# Altium PCB Motor_Control_Board.PcbDoc
Units mil, origin at the board's own origin, x right, y up, seen from the top; angles counter-clockwise.
Board outline 4564.96 x 4140.75 mil, 2 copper layers (Top Layer, Bottom Layer), stack 65.792 mil thick; 131 components, 117 nets, 711 pads, 12 vias.
Unrouted connection lines stored in the file: 368.
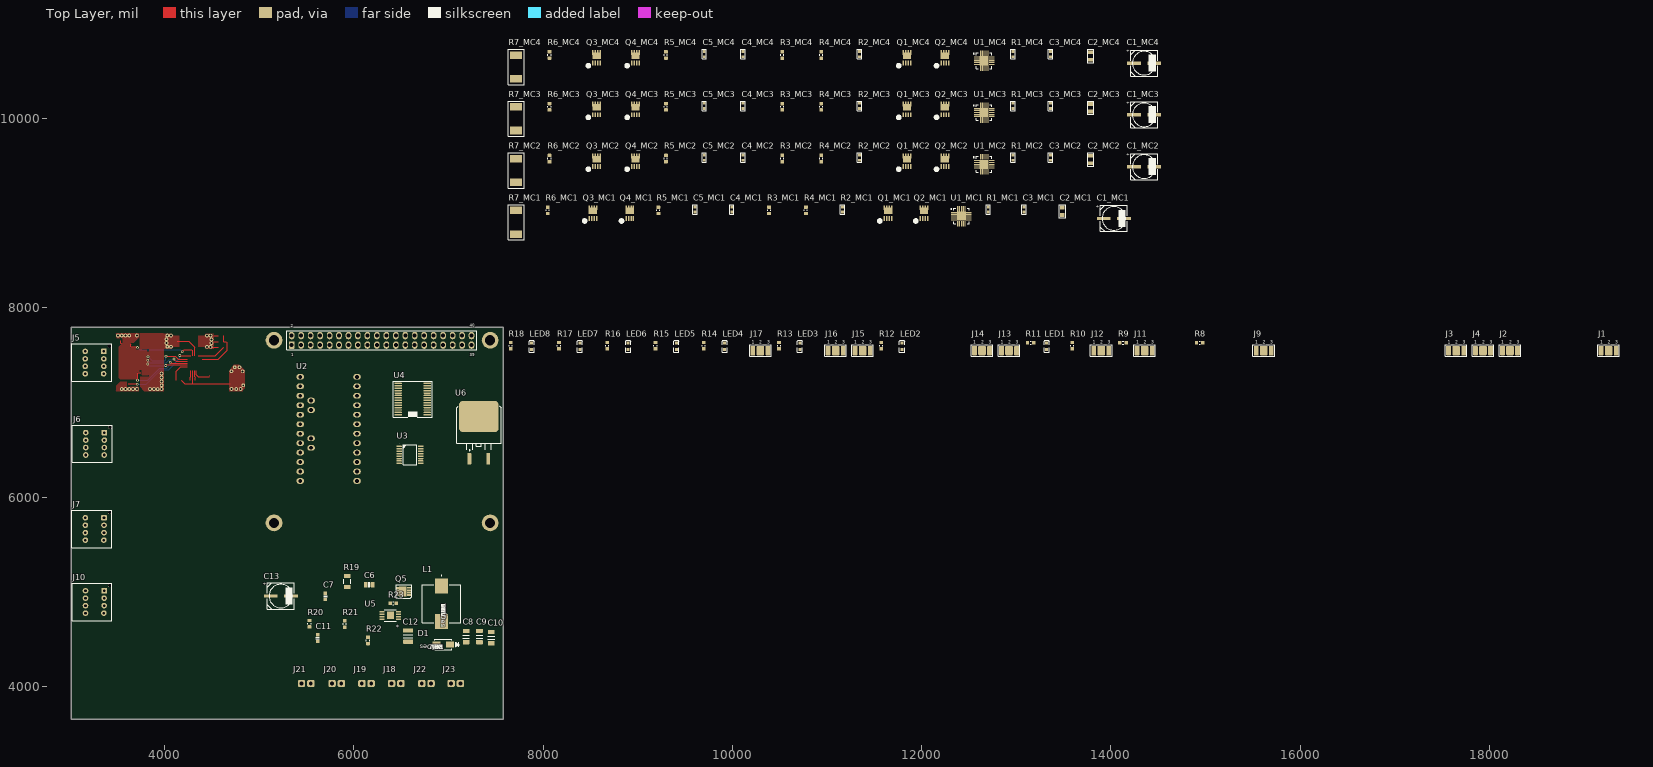
[diagram p0: Top Layer view]
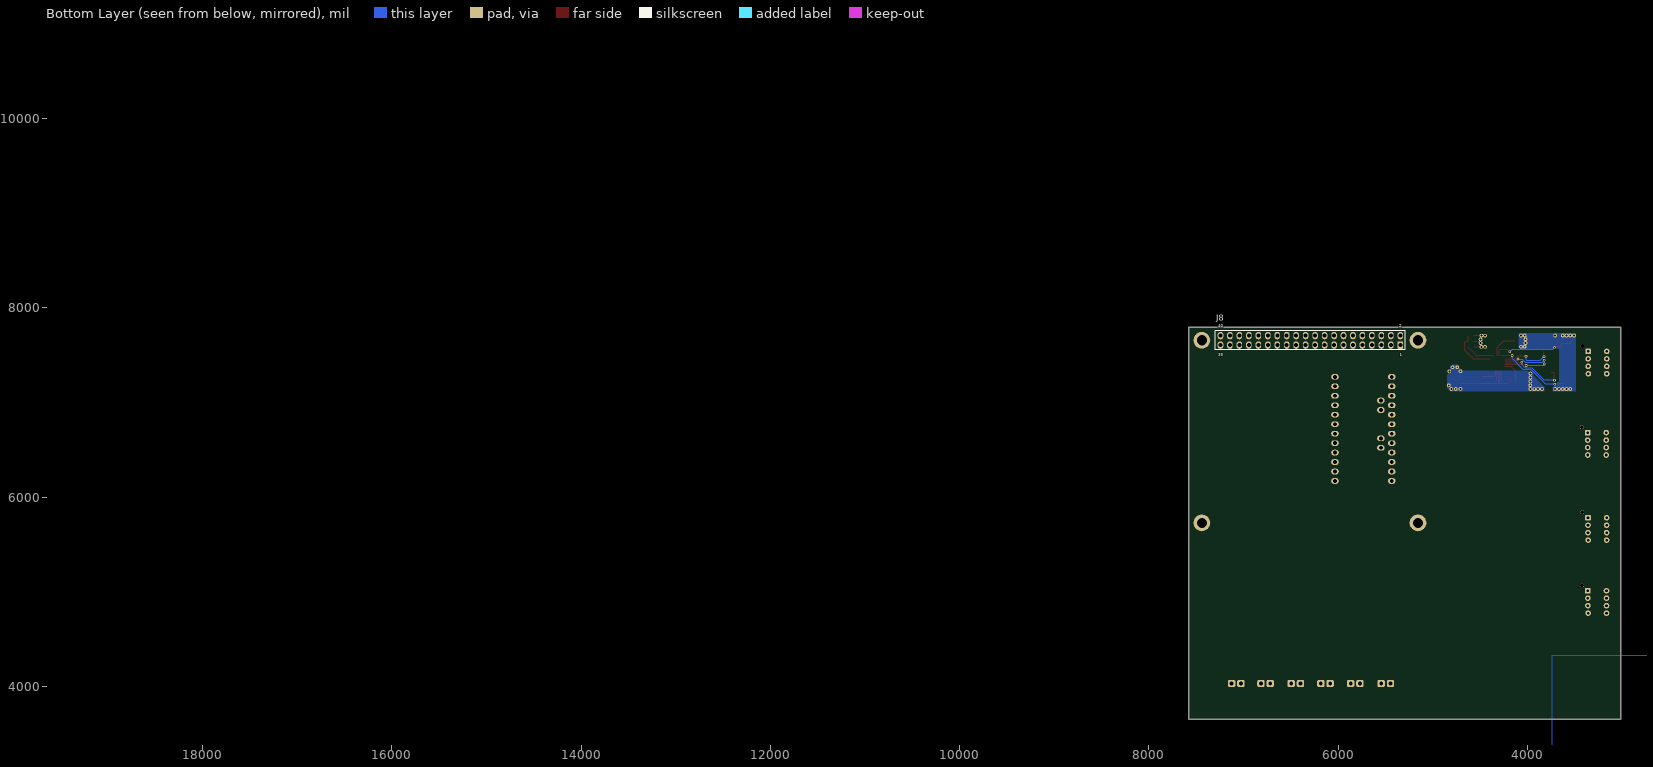
[diagram p1: Bottom Layer view, seen from below]

## Layer stack, top to bottom
Top Solder: solder mask 0.4, Solder Resist, Dk 3.5
Top Layer: signal copper 1.4
Dielectric 1: dielectric 62.9921, FR-4, Dk 4.8
Bottom Layer: signal copper 1.4
Bottom Solder: solder mask 0.4, Solder Resist, Dk 3.5

## Board outline
3013.78,3654.53 3013.78,7795.28 7578.74,7795.28 7578.74,3654.53

## Design rules (kind name [scope] priority, off if disabled: settings)
Clearance [All] p1: gap=6
PlaneConnect [All] p1: planeconnectstyle=Direct reliefexpansion=20 reliefentries=4 reliefconductorwidth=10 reliefairgap=10
PolygonConnect [All] p1: connectstyle=Direct reliefconductorwidth=10 reliefentries=4 polygonreliefangle="90 Angle" airgapwidth=10
RoutingVias [All] p1: holewidth=28 width=50 viastyle="Through Hole" minholewidth=13 minwidth=20 maxholewidth=50 maxwidth=100
SolderMaskExpansion [All] p1: expansion=4
UnpouredPolygon [All] p1: allowunpoured=FALSE
Width [All] p1: maxlimit=1000 minlimit=6 preferedwidth=10 minimp=50.000000 maximp=50.000000 favimp=50.000000
28 further rules are at their usual default settings.

## Classes and differential pairs
component class Main: J1 J2 J3 J4 J5 J6 J7 J8 J9 J10 J11 J12 J13 J14 J15 J16 J17 LED1 LED2 LED3 LED4 LED5 LED6 LED7 LED8 R8 R9 R10 R11 R12 R13 R14 R15 R16 R17 R18 U2 U3 U4
component class MC1: C1_MC1 C2_MC1 C3_MC1 C4_MC1 C5_MC1 Q1_MC1 Q2_MC1 Q3_MC1 Q4_MC1 R1_MC1 R2_MC1 R3_MC1 R4_MC1 R5_MC1 R6_MC1 R7_MC1 U1_MC1
component class MC2: C1_MC2 C2_MC2 C3_MC2 C4_MC2 C5_MC2 Q1_MC2 Q2_MC2 Q3_MC2 Q4_MC2 R1_MC2 R2_MC2 R3_MC2 R4_MC2 R5_MC2 R6_MC2 R7_MC2 U1_MC2
component class MC3: C1_MC3 C2_MC3 C3_MC3 C4_MC3 C5_MC3 Q1_MC3 Q2_MC3 Q3_MC3 Q4_MC3 R1_MC3 R2_MC3 R3_MC3 R4_MC3 R5_MC3 R6_MC3 R7_MC3 U1_MC3
component class MC4: C1_MC4 C2_MC4 C3_MC4 C4_MC4 C5_MC4 Q1_MC4 Q2_MC4 Q3_MC4 Q4_MC4 R1_MC4 R2_MC4 R3_MC4 R4_MC4 R5_MC4 R6_MC4 R7_MC4 U1_MC4
component class Power_Supply: C6 C7 C8 C9 C10 C11 C12 C13 D1 J18 J19 J20 J21 J22 J23 L1 Q5 R19 R20 R21 R22 R23 U5 U6
net class A_ENC[0..3]: A_ENC0 A_ENC1 A_ENC2 A_ENC3
net class A_OUT[0..3]: A_OUT0 A_OUT1 A_OUT2 A_OUT3
net class AIOUT[0..3]: AIOUT0 AIOUT1 AIOUT2 AIOUT3
net class B_ENC[0..3]: B_ENC0 B_ENC1 B_ENC2 B_ENC3
net class B_OUT[0..3]: B_OUT0 B_OUT1 B_OUT2 B_OUT3
net class ENABLE[0..3]: ENABLE0 ENABLE1 ENABLE2 ENABLE3
net class MODE[0..3]: MODE0 MODE1 MODE2 MODE3
net class PHASE[0..3]: PHASE0 PHASE1 PHASE2 PHASE3
channel class Motor_Control: MC1 MC2 MC3 MC4

## Components (designator, comment, footprint, x,y, rotation, side; value= is the part's Value field where it differs from the comment)
C1_MC1 "UUD1C221MCL1GS" "NICH 6.3mm 7.7mm" 14031.2,8945.32 r0 top (schematic designator C1)
C1_MC2 "UUD1C221MCL1GS" "NICH 6.3mm 7.7mm" 14351.09,9492.59 r0 top (schematic designator C1)
C1_MC3 "UUD1C221MCL1GS" "NICH 6.3mm 7.7mm" 14351.09,10039.86 r0 top (schematic designator C1)
C1_MC4 "UUD1C221MCL1GS" "NICH 6.3mm 7.7mm" 14351.09,10586.15 r0 top (schematic designator C1)
C2_MC1 "10uF" 0805C-GENERIC 13485.89,8990.6 r90 top (schematic designator C2)
C2_MC2 "10uF" 0805C-GENERIC 13785.12,9537.87 r90 top (schematic designator C2)
C2_MC3 "10uF" 0805C-GENERIC 13785.12,10084.15 r90 top (schematic designator C2)
C2_MC4 "10uF" 0805C-GENERIC 13785.12,10631.42 r90 top (schematic designator C2)
C3_MC1 "100nF" 0603C-GENERIC 13083.32,9012.25 r90 top (schematic designator C3)
C3_MC2 "100nF" 0603C-GENERIC 13363.84,9559.52 r90 top (schematic designator C3)
C3_MC3 "100nF" 0603C-GENERIC 13363.84,10106.79 r90 top (schematic designator C3)
C3_MC4 "100nF" 0603C-GENERIC 13363.84,10653.08 r90 top (schematic designator C3)
C4_MC1 "1nF" 0603C-GENERIC 9994.58,9012.25 r90 top (schematic designator C4)
C4_MC2 "1nF" 0603C-GENERIC 10114.67,9559.52 r90 top (schematic designator C4)
C4_MC3 "1nF" 0603C-GENERIC 10114.67,10106.79 r90 top (schematic designator C4)
C4_MC4 "1nF" 0603C-GENERIC 10114.67,10653.08 r90 top (schematic designator C4)
C5_MC1 "100nF" 0603C-GENERIC 9604.8,9012.25 r90 top (schematic designator C5)
C5_MC2 "100nF" 0603C-GENERIC 9704.21,9559.52 r90 top (schematic designator C5)
C5_MC3 "100nF" 0603C-GENERIC 9704.21,10106.79 r90 top (schematic designator C5)
C5_MC4 "100nF" 0603C-GENERIC 9704.21,10653.08 r90 top (schematic designator C5)
C6 "approved sub OK" CAPC2012X135N 6163.39,5074.8 r0 top
C7 "approved sub OK" CAPC1608X90N 5699.8,4952.76 r90 top
C8 "approved sub OK" CAPC3216X180N 7187.99,4527.56 r90 top
C9 "approved sub OK" CAPC3216X180N 7327.76,4527.56 r90 top
C10 "approved sub OK" CAPC3216X180N 7452.76,4516.73 r90 top
C11 "approved sub OK" CAPC1608X90N 5619.09,4511.81 r90 top
C12 "47u" CAPC3225X220N 6574.8,4531.5 r270 top
C13 "UUD1C221MCL1GS" "NICH 6.3mm 7.7mm" 5229.33,4955.71 r0 top
D1 "B340LA-13-F" SMA 6945.87,4442.91 r180 top
J1 "Jumper" Jump_3Way 19258.81,7548.6 r0 top
J2 "Jumper" Jump_3Way 18217.42,7548.6 r0 top
J3 "Jumper" Jump_3Way 17647.51,7548.6 r0 top
J4 "Jumper" Jump_3Way 17931.98,7548.6 r0 top
J5 "B08B-PNDZS-1" "JST PND 8 Pin" 3359.25,7540.35 r270 top
J6 "B08B-PNDZS-1" "JST PND 8 Pin" 3365.16,6682.09 r270 top
J7 "B08B-PNDZS-1" "JST PND 8 Pin" 3361.22,5782.48 r270 top
J8 "2223" "40P_PCB_SOCKET_BRD_MNT  REVERSE" 6294.29,7657.48 r270 bottom
J9 "Jumper" Jump_3Way 15614.94,7548.6 r0 top
J10 "B08B-PNDZS-1" "JST PND 8 Pin" 3362.2,5011.81 r270 top
J11 "Jumper" Jump_3Way 14356.02,7548.6 r0 top
J12 "Jumper" Jump_3Way 13898.32,7548.6 r0 top
J13 "Jumper" Jump_3Way 12923.86,7548.6 r0 top
J14 "Jumper" Jump_3Way 12638.41,7548.6 r0 top
J15 "Jumper" Jump_3Way 11376.54,7548.6 r0 top
J16 "Jumper" Jump_3Way 11091.09,7548.6 r0 top
J17 "Jumper" Jump_3Way 10296.76,7548.6 r0 top
J18 "CONN_2_JST B2B-XH-A" CONN_JST_XT_TH_2 6448.82,4031.5 r0 top
J19 "CONN_2_JST B2B-XH-A" CONN_JST_XT_TH_2 6134.84,4031.5 r0 top
J20 "CONN_2_JST B2B-XH-A" CONN_JST_XT_TH_2 5819.88,4031.5 r0 top
J21 "CONN_2_JST B2B-XH-A" CONN_JST_XT_TH_2 5497.05,4031.5 r0 top
J22 "CONN_2_JST B2B-XH-A" CONN_JST_XT_TH_2 6767.72,4031.5 r0 top
J23 "CONN_2_JST B2B-XH-A" CONN_JST_XT_TH_2 7077.76,4031.5 r0 top
L1 "74437368022" IND_WE-LHMI-SM 6925.2,4874.02 r270 top
LED1 "Green" LED-0603-GREEN 13320.53,7594.86 r90 top
LED2 "Green" LED-0603-GREEN 11792.9,7594.86 r90 top
LED3 "Green" LED-0603-GREEN 10713.12,7594.86 r90 top
LED4 "Green" LED-0603-GREEN 9918.79,7594.86 r90 top
LED5 "Green" LED-0603-GREEN 9408.92,7594.86 r90 top
LED6 "Green" LED-0603-GREEN 8898.07,7594.86 r90 top
LED7 "Green" LED-0603-GREEN 8388.2,7594.86 r90 top
LED8 "Green" LED-0603-GREEN 7878.34,7594.86 r90 top
Q1_MC1 "SIS406DN" "1212-8 PowerPAK Single" 11646.24,9002.41 r90 top (schematic designator Q1)
Q1_MC2 "SIS406DN" "1212-8 PowerPAK Single" 11846.05,9549.68 r90 top (schematic designator Q1)
Q1_MC3 "SIS406DN" "1212-8 PowerPAK Single" 11846.05,10096.95 r90 top (schematic designator Q1)
Q1_MC4 "SIS406DN" "1212-8 PowerPAK Single" 11846.05,10643.24 r90 top (schematic designator Q1)
Q2_MC1 "SIS406DN" "1212-8 PowerPAK Single" 12026.18,9002.41 r90 top (schematic designator Q2)
Q2_MC2 "SIS406DN" "1212-8 PowerPAK Single" 12245.68,9549.68 r90 top (schematic designator Q2)
Q2_MC3 "SIS406DN" "1212-8 PowerPAK Single" 12245.68,10096.95 r90 top (schematic designator Q2)
Q2_MC4 "SIS406DN" "1212-8 PowerPAK Single" 12245.68,10643.24 r90 top (schematic designator Q2)
Q3_MC1 "SIS406DN" "1212-8 PowerPAK Single" 8526.99,9002.41 r90 top (schematic designator Q3)
Q3_MC2 "SIS406DN" "1212-8 PowerPAK Single" 8566.36,9549.68 r90 top (schematic designator Q3)
Q3_MC3 "SIS406DN" "1212-8 PowerPAK Single" 8566.36,10096.95 r90 top (schematic designator Q3)
Q3_MC4 "SIS406DN" "1212-8 PowerPAK Single" 8566.36,10643.24 r90 top (schematic designator Q3)
Q4_MC1 "SIS406DN" "1212-8 PowerPAK Single" 8916.77,9002.41 r90 top (schematic designator Q4)
Q4_MC2 "SIS406DN" "1212-8 PowerPAK Single" 8976.82,9549.68 r90 top (schematic designator Q4)
Q4_MC3 "SIS406DN" "1212-8 PowerPAK Single" 8976.82,10096.95 r90 top (schematic designator Q4)
Q4_MC4 "SIS406DN" "1212-8 PowerPAK Single" 8976.82,10643.24 r90 top (schematic designator Q4)
Q5 "CSD25402Q3A" TRANS_NEXFET_Q3A 6525.59,5002.95 r180 top
R1_MC1 "20K" 0603R-GENERIC 12704.36,9012.25 r90 top (schematic designator R1)
R1_MC2 "20K" 0603R-GENERIC 12964.22,9559.52 r90 top (schematic designator R1)
R1_MC3 "20K" 0603R-GENERIC 12964.22,10106.79 r90 top (schematic designator R1)
R1_MC4 "20K" 0603R-GENERIC 12964.22,10653.08 r90 top (schematic designator R1)
R2_MC1 "20K" 0603R-GENERIC 11163.93,9012.25 r90 top (schematic designator R2)
R2_MC2 "20K" 0603R-GENERIC 11344.06,9559.52 r90 top (schematic designator R2)
R2_MC3 "20K" 0603R-GENERIC 11344.06,10106.79 r90 top (schematic designator R2)
R2_MC4 "20K" 0603R-GENERIC 11344.06,10653.08 r90 top (schematic designator R2)
R3_MC1 "Thick Film" RESC1608X55N 10388.3,9030.95 r90 top (schematic designator R3)
R3_MC2 "Thick Film" RESC1608X55N 10528.07,9578.22 r90 top (schematic designator R3)
R3_MC3 "Thick Film" RESC1608X55N 10528.07,10125.49 r90 top (schematic designator R3)
R3_MC4 "Thick Film" RESC1608X55N 10528.07,10672.76 r90 top (schematic designator R3)
R4_MC1 "Thick Film" RESC1608X55N 10778.08,9030.95 r90 top (schematic designator R4)
R4_MC2 "Thick Film" RESC1608X55N 10938.53,9578.22 r90 top (schematic designator R4)
R4_MC3 "Thick Film" RESC1608X55N 10938.53,10125.49 r90 top (schematic designator R4)
R4_MC4 "Thick Film" RESC1608X55N 10938.53,10672.76 r90 top (schematic designator R4)
R5_MC1 "Thick Film" RESC1608X55N 9218.95,9030.95 r90 top (schematic designator R5)
R5_MC2 "Thick Film" RESC1608X55N 9298.68,9578.22 r90 top (schematic designator R5)
R5_MC3 "Thick Film" RESC1608X55N 9298.68,10125.49 r90 top (schematic designator R5)
R5_MC4 "Thick Film" RESC1608X55N 9298.68,10672.76 r90 top (schematic designator R5)
R6_MC1 "Thick Film" RESC1608X55N 8048.62,9030.95 r90 top (schematic designator R6)
R6_MC2 "Thick Film" RESC1608X55N 8068.31,9578.22 r90 top (schematic designator R6)
R6_MC3 "Thick Film" RESC1608X55N 8068.31,10125.49 r90 top (schematic designator R6)
R6_MC4 "Thick Film" RESC1608X55N 8068.31,10672.76 r90 top (schematic designator R6)
R7_MC1 "WSL2512R0150FEA18" RESC_2512 7714.94,8904.96 r90 top (schematic designator R7)
R7_MC2 "WSL2512R0150FEA18" RESC_2512 7714.94,9452.23 r90 top (schematic designator R7)
R7_MC3 "WSL2512R0150FEA18" RESC_2512 7714.94,9999.5 r90 top (schematic designator R7)
R7_MC4 "WSL2512R0150FEA18" RESC_2512 7714.94,10546.77 r90 top (schematic designator R7)
R8 "Thick Film" RESC1608X55N 14937.74,7633.25 r0 top
R9 "Thick Film" RESC1608X55N 14127.66,7633.25 r0 top
R10 "Thick Film" RESC1608X55N 13591.21,7601.75 r90 top
R11 "Thick Film" RESC1608X55N 13153.2,7633.25 r0 top
R12 "Thick Film" RESC1608X55N 11573.4,7601.75 r90 top
R13 "Thick Film" RESC1608X55N 10493.62,7601.75 r90 top
R14 "Thick Film" RESC1608X55N 9698.31,7601.75 r90 top
R15 "Thick Film" RESC1608X55N 9188.44,7601.75 r90 top
R16 "Thick Film" RESC1608X55N 8678.57,7601.75 r90 top
R17 "Thick Film" RESC1608X55N 8168.71,7601.75 r90 top
R18 "Thick Film" RESC1608X55N 7658.84,7601.75 r90 top
R19 "CSR1206FK10L0" 1206 5932.09,5109.25 r90 top
R20 "Thick Film" RESC1608X55N 5532.48,4663.39 r90 top
R21 "Thick Film" RESC1608X55N 5903.54,4660.43 r270 top
R22 "Thick Film" RESC1608X55N 6150.59,4486.22 r90 top
R23 "Thick Film" RESC1608X55N 6417.32,4878.94 r180 top
U1_MC1 "A4956" QFN-20 12420.88,8969.93 r0 top (schematic designator U1)
U1_MC2 "A4956" QFN-20 12661.05,9517.2 r0 top (schematic designator U1)
U1_MC3 "A4956" QFN-20 12661.05,10064.47 r0 top (schematic designator U1)
U1_MC4 "A4956" QFN-20 12661.05,10611.74 r0 top (schematic designator U1)
U2 "Arduino Pro Mini" "Arduino Pro Mini" 6034.45,6171.26 r180 top
U3 "PCA9554" TSSOP65P640X120-16N 6593.5,6446.85 r0 top
U4 "PA9685" TSSOP28 6776.57,6870.08 r0 top
U5 "LM25085AMY/NOPB" MUY08A 6385.83,4750 r180 top
U6 "LD1085D2T33R" D2PAK-3 7321.85,6629.92 r270 top

## Footprints (in the part's own frame and the unit in brackets; to place one, negate y for a bottom-side part, rotate by r counter-clockwise, add the part's x,y. Pads: shape width x height; smd on the part's side, far side on the other; paste and mask are expansions set on the pad)
"40P_PCB_SOCKET_BRD_MNT  REVERSE" [mm] "SOCKET BRD MNT 40POS 2.54MM"
  rrect25% 2x1.5 hole 1.067: 1(1.27,24.13)
  oval 2x1.5 hole 1.067: 2(-1.27,24.13) 3(1.27,21.59) 4(-1.27,21.59) 5(1.27,19.05) 6(-1.27,19.05) 7(1.27,16.51) 8(-1.27,16.51) 9(1.27,13.97) 10(-1.27,13.97) 11(1.27,11.43) 12(-1.27,11.43) 13(1.27,8.89) 14(-1.27,8.89) 15(1.27,6.35) 16(-1.27,6.35) 17(1.27,3.81) 18(-1.27,3.81) 19(1.27,1.27) 20(-1.27,1.27) 21(1.27,-1.27) 22(-1.27,-1.27) 23(1.27,-3.81) 24(-1.27,-3.81) 25(1.27,-6.35) 26(-1.27,-6.35) 27(1.27,-8.89) 28(-1.27,-8.89) 29(1.27,-11.43) 30(-1.27,-11.43) 31(1.27,-13.97) 32(-1.27,-13.97) 33(1.27,-16.51) 34(-1.27,-16.51) 35(1.27,-19.05) 36(-1.27,-19.05) 37(1.27,-21.59) 38(-1.27,-21.59) 39(1.27,-24.13) 40(-1.27,-24.13)
  silkscreen extent -2.57,-25.48 2.59,25.48, body extent -2.5,-25.4 2.5,25.35, height 8.49
0603C-GENERIC [mil] "CAPACITOR 0603"
  rect 30x30 smd: 1(0,0) 2(55,0)
  silkscreen extent -23,-23 78,23, body extent -4,-15 59,15, height 19
0603R-GENERIC [mil] "RESISTOR 0603"
  rect 30x30 smd: 1(0,0) 2(55,0)
  silkscreen extent -23,-23 78,23, body extent -4,-15 59,15, height 19
0805C-GENERIC [mil] "CAPACITOR 0805"
  rect 40x50 smd: 1(-10,0) 2(70,0)
  silkscreen extent -40,-35 100,35, body extent -11,-25 70,25, height 26
1206 [mil]
  rect 44x71 smd: 1(-59,0) 2(59,0)
  silkscreen extent -24,-36 24,36
"1212-8 PowerPAK Single" [mil] "1212-8 PowerPAK Single"
  rect 68x88 smd paste-7.87: D(22,0)
  rect 50x16 smd: D(56.5,-39) D(56.5,-13) D(56.5,13) D(56.5,39) G(-56.5,-39) S(-56.5,-13) S(-56.5,13) S(-56.5,39)
  silkscreen extent -99,73 -69,103, body extent -70,-70 70,70, height 35
"Arduino Pro Mini" [mil]
  oval 80x60 hole 40: 2(0,-400) 3(0,-500) 4(0,-600) 5(0,-700) 6(0,-800) 7(0,-900) 8(0,-1000) 9(0,-1100) 10(600,-1100) 11(600,-1000) 12(600,-900) 13(600,-800) A0(600,-700) A1(600,-600) A2(600,-500) A3(600,-400) A4(485,-450) A5(485,-350) A6(485,-850) A7(485,-750) GND(0,-300) GND(600,-100) RAW(600,0) RST1(0,-200) RST2(600,-200) RXD(0,-100) TXD(0,0) VCC(600,-300)
  body extent -53,-1149 653,150, height 264
CAPC1608X90N [mm] "Chip Capacitor, Body 1.6x0.8mm, EIA 0603, IPC Medium Density"
  round 0.254 on Mech15: 0(0,0)
  rrect25% 0.9x1 smd: 1(-0.85,0) 2(0.85,0)
  Top Layer pour cut-out: -0.6,0.5 -0.4,0.7 0.4,0.7 0.6,0.5 0.6,-0.5 0.4,-0.7 -0.4,-0.7 -0.6,-0.5
  silkscreen extent -0.18,-0.48 0.18,0.48, body extent -0.85,-0.45 0.85,0.45, height 0.89
CAPC2012X135N [mm] "Chip Capacitor, Body 2.0x1.2mm, EIA 0805, IPC Medium Density"
  round 0.254 on Mech15: 0(0,0)
  rrect25% 1x1.4 smd: 1(-0.9,0) 2(0.9,0)
  Top Layer pour cut-out: -0.675,0.7 -0.475,0.9 0.475,0.9 0.675,0.7 0.675,-0.7 0.475,-0.9 -0.475,-0.9 -0.675,-0.7
  silkscreen extent -0.15,-0.65 0.15,0.65, body extent -1.1,-0.72 1.1,0.73, height 1.34
CAPC3216X180N [mm] "Chip Capacitor, Body 3.2x1.6mm, 1.8mm H, EIA 1206, IPC Medium Density"
  round 0.508 on Mech15: 0(0,0)
  rrect25% 1.15x1.8 smd: 1(-1.5,0) 2(1.5,0)
  silkscreen extent -0.4,-0.88 0.4,0.88, body extent -1.7,-0.9 1.7,0.9, height 1.8
CAPC3225X220N [mm] "Chip Capacitor, Body 3.2x2.5mm, EIA 1210, IPC Medium Density"
  round 0.508 on Mech15: 0(0,0)
  rrect25% 1.15x2.7 smd: 1(-1.5,0) 2(1.5,0)
  silkscreen extent -0.4,-1.3 0.4,1.3, body extent -1.8,-1.4 1.8,1.4, height 2.19
CONN_JST_XT_TH_2 [mm] "CONN HEADER XH TOP 2POS 2.5MM"
  rrect50% 2x2 hole 1: 1(-1.25,0) 2(1.25,0)
  body extent -3.7,-2.35 3.7,3.4, height 2.9
D2PAK-3 [mil] "D-PAK/TO-263-3; 3 Leads (1 Cropped); Body 14.7 (inc. leads) x 10.2 mm (LxW max)"
  round 20 on Mech15: 0(0,0)
  rrect25% 120x40 smd: 1(222.5,-100) 3(222.5,100)
  rrect25% 330x420 smd: 4(-222.5,0)
  silkscreen extent -335,-232 139,236, body extent -361,-197 256,197, height 189
IND_WE-LHMI-SM [mil]
  rect 161x138 smd: 1(-187,0) 2(187,0)
  silkscreen extent -300,-203 203,203
"JST PND 8 Pin" [mm] "Connector; Header; 6 Position 0.100\" pitch"
  round 1 hole 1: 0(-1.45,1.55)
  rrect25% 1.5x1.5 hole 0.7: 1(0,0)
  round 1.5 hole 0.7: 2(0,-5) 3(2,0) 4(2,-5) 5(4,0) 6(4,-5) 7(6,-0.051) 8(6,-5)
  silkscreen extent -2,-8.61 8,2.1, body extent -2,-8.6 8,2.1, height 9.9
Jump_3Way [mil] "SMT Battery jumper pads"
  rrect25% 50x100 smd: 1(-80,0) 3(80,0)
  rrect25% 80x100 smd: 2(0,0)
  rrect25% 218x108 on Top Solder: SM(0,0)
  silkscreen extent -115,-60 115,60
LED-0603-GREEN [mm]
  round 0.254 on Mech15: 0(0,0)
  rrect25% 0.8x0.8 smd: A(-0.85,0) K(0.85,0)
  Top Layer pour cut-out: -0.5,0.5 0.5,0.5 0.5,-0.5 -0.5,-0.5
  silkscreen extent -1.55,-0.67 1.68,0.67, body extent -0.8,-0.4 0.8,0.4, height 0.75
MUY08A [mil]
  rect 54x18 smd mask+4: 1(-86.5,38.39) 2(-86.5,12.8) 3(-86.5,-12.8) 4(-86.5,-38.39) 5(86.5,-38.39) 6(86.5,-12.8) 7(86.5,12.8) 8(86.5,38.39)
  rect 74x79 smd: 9(0,0)
  silkscreen extent -61,-61 61,61
"NICH 6.3mm 7.7mm" [mm]
  rect 3.7x0.9 smd: +(-2.7,0) -(2.7,0)
  silkscreen extent -3.6,-3.5 3.6,3.5, body extent -3.7,-3.4 3.7,3.4, height 8.05
QFN-20 [mm]
  rect 1.5x0.3 smd: 1(-2,1) 2(-2,0.5) 3(-2,0) 4(-2,-0.5) 5(-2,-1) 11(2,-1) 12(2,-0.5) 13(2,0) 14(2,0.5) 15(2,1)
  rect 0.3x1.5 smd: 6(-1,-2) 7(-0.5,-2) 8(0,-2) 9(0.5,-2) 10(1,-2) 16(1,2) 17(0.5,2) 18(0,2) 19(-0.5,2) 20(-1,2)
  rect 2.45x2.45 smd paste-0.5: 21(0,0)
  silkscreen extent -2.9,-2.1 2.1,2.1, body extent -2.11,-2.07 2.04,2.08, height 0.81
RESC1608X55N [mm] "Chip Resistor, Body 1.6x0.8mm, EIA 0603, IPC Medium Density"
  round 0.254 on Mech15: 0(0,0)
  rrect25% 0.9x1 smd: 1(-0.85,0) 2(0.85,0)
  Top Layer pour cut-out: -0.6,0.5 -0.4,0.7 0.4,0.7 0.6,0.5 0.6,-0.5 0.4,-0.7 -0.4,-0.7 -0.6,-0.5
  silkscreen extent -0.15,-0.41 0.15,0.41, body extent -0.87,-0.47 0.88,0.48, height 0.54
RESC_2512 [mil]
  rect 80x125 smd: 1(-125,0) 2(125,0)
  silkscreen extent -186,-84 185,83, body extent -139,-61 136,61, height 19
SMA [mil]
  rect 86x64 smd: 1(-73,0) 2(73,0)
  silkscreen extent -174,-58 90,58
TRANS_NEXFET_Q3A [mm]
  rect 1.27x0.5 smd paste-0.327 mask+0.076: 1(-1.625,0.975) 2(-1.625,0.325) 3(-1.625,-0.325) 4(-1.625,-1.016)
  rect 1.27x0.5 smd paste-0.237 mask+0.076: 5(1.385,-0.975) 6(1.385,-0.325) 7(1.385,0.325) 8(1.385,0.975)
  rect 1.96x2.65 smd paste-1.312 mask+0.076: 9(0.205,0)
  silkscreen extent -2.21,-1.8 1.9,1.8
TSSOP28 [mm]
  rect 2x0.4 smd: 1(0,0)
  oval 2x0.4 smd: 2(0,0.65) 3(0,1.3) 4(0,1.95) 5(0,2.6) 6(0,3.25) 7(0,3.9) 8(0,4.55) 9(0,5.2) 10(0,5.85) 11(0,6.5) 12(0,7.15) 13(0,7.8) 14(0,8.45) 15(-7.8,8.45) 16(-7.8,7.8) 17(-7.8,7.15) 18(-7.8,6.5) 19(-7.8,5.85) 20(-7.8,5.2) 21(-7.8,4.55) 22(-7.8,3.9) 23(-7.8,3.25) 24(-7.8,2.6) 25(-7.8,1.95) 26(-7.8,1.3) 27(-7.8,0.65) 28(-7.8,0)
  silkscreen extent -9.14,-0.58 1.34,9.03, body extent -7.2,-0.33 -0.55,8.79, height 1.04
TSSOP65P640X120-16N [mm] "TSSOP, 16 Leads, Body 5.1x4.5mm (max), Pitch 0.65mm, IPC Medium Density"
  round 0.508 on Mech15: 0(0,0)
  oval 1.5x0.4 smd paste-0.051: 1(-2.9,2.275) 2(-2.9,1.625) 3(-2.9,0.975) 4(-2.9,0.325) 5(-2.9,-0.325) 6(-2.9,-0.975) 7(-2.9,-1.625) 8(-2.9,-2.275) 9(2.9,-2.275) 10(2.9,-1.625) 11(2.9,-0.975) 12(2.9,-0.325) 13(2.9,0.325) 14(2.9,0.975) 15(2.9,1.625) 16(2.9,2.275)
  silkscreen extent -1.8,-2.7 1.8,2.7, body extent -3.25,-2.55 3.25,2.55, height 1.2

## Part data
C1_MC1 C1_MC2 C1_MC3 C1_MC4 C13: library part NICHICON_220uF_16V, "GENERIC CAPACITOR POLARISED"
C2_MC1 C2_MC2 C2_MC3 C2_MC4: library part 0805C-10UF-16V-X5R-TDK, "CAPACITOR 0805 CERAMIC"
C3_MC1 C3_MC2 C3_MC3 C3_MC4 C5_MC1 C5_MC2 C5_MC3 C5_MC4: library part 0603C-100NF-25V-X7R-TDK, "CAPACITOR 0603 CERAMIC"
C4_MC1 C4_MC2 C4_MC3 C4_MC4: library part 0603C-1NF-50V-X7R, "CAPACITOR 0603 CERAMIC"
C6: library part CAPC_470n_0805_X7R_16V_10%, "Capacitor SMD Cer 470nF 10% 16V X7R 0805"
C7: library part CAPC_1n_0603_X7R_100V_10%, "Capacitor SMD Cer 1nF 10% 100V X7R 0603"
C8 C9 C10: library part CAPC_10u_1206_16V, "Capacitor SMD Cer 10uF 10% 16V X7R 1206"
C11: library part CAPC_2n4_50V_0603, "Capacitor SMD Cer 2400pF  50V NP0 0603"
C12: library part CAPC_47u_1210_10V_X5R_10%, "Capacitor SMD Cer 47uF 10% 10V 1210"
D1 L1 Q5 R19 U5: "Imported"
J1 J2 J3 J4 J9 J11 J12 J13 J14 J15 J16 J17: library part JUMP_3WAY, "SMD jumper"
J5 J6 J7 J10: library part "JST PND 8 PIN"
J8: library part "CONN_SOCKET_2x20P_0.100in  Rpi Female", "40 Position Header Connector 0.100\" (2.54mm) Through Hole Gold"
J18 J19 J20 J21 J22 J23: "CONN HEADER XH SIDE 2POS 2.5MM"
LED1 LED2 LED3 LED4 LED5 LED6 LED7 LED8: library part LED_SMD_Green_0603_525nm_350mcd, "LED 0603 SMD Green 525nm 350mcd 20mA"
Q1_MC1 Q1_MC2 Q1_MC3 Q1_MC4 Q2_MC1 Q2_MC2 Q2_MC3 Q2_MC4 Q3_MC1 Q3_MC2 Q3_MC3 Q3_MC4 Q4_MC1 Q4_MC2 Q4_MC3 Q4_MC4: library part MOSFET_N_CHAN_SIS406DN
R1_MC1 R1_MC2 R1_MC3 R1_MC4 R2_MC1 R2_MC2 R2_MC3 R2_MC4: library part 0603R-20K, "GENERIC RESISTOR 0603"
R3_MC1 R3_MC2 R3_MC3 R3_MC4 R4_MC1 R4_MC2 R4_MC3 R4_MC4 R5_MC1 R5_MC2 R5_MC3 R5_MC4 R6_MC1 R6_MC2 R6_MC3 R6_MC4: library part RES_1K_0603_5%, "Resistor SMD chip 1k Ohm 0.1W 5% 0603"
R7_MC1 R7_MC2 R7_MC3 R7_MC4: library part RES_0.015, "RES SMD 0.015 OHM 1% 2W 2512"
R8 R9 R10: library part RES_1K_0603_1%, "Resistor SMD chip 1k Ohm 0.1W 1% 0603"
R11 R12 R13 R14 R15 R16 R17 R18: library part RES_200R_0603_5%, "Resistor SMD chip 200 Ohm 0.1W 5% 0603"
R20: library part RES_2.21K_0603_1%, "Resistor SMD chip 2.21k Ohm 0.1W 1% 0603"
R21: library part RES_35.7K_0603_1%, "Resistor SMD chip 35.7K Ohm 0.1W 1% 0603"
R22: library part RES_10K_0603_1%, "Resistor SMD chip 10k Ohm 0.1W 1% 0603"
R23: library part RES_2K2_0603_1%, "Resistor SMD chip 2.2k Ohm 0.1W 1% 0603"
U1_MC1 U1_MC2 U1_MC3 U1_MC4: library part Motor_CTRL_IC_A4956, "PWM Motor Controller"
U3: "IO EXPANDER PUSH PULL WEAK PULLUP"
U4: library part PCA9685, "LED Driver IC 16 Output Linear PWM Dimming 25mA 28-TSSOP"
U6: "Voltage Regulator IC, IC REG LDO 3.3V 3A D2PAK"

## Free pads (board coordinates)
  round 40 hole 20: 0(3628,7142.39) 0(3628,7708) 0(3668,7142.39) 0(3708,7142.39) 0(3708,7708) 1(3509,7708) 2(3548,7142.39) 2(3548,7708) 3(3588,7142.39) 3(3588,7708) 4(3848,7142) 4(3888.65,7142) 4(3929,7142) 4(3970,7142.39) 5(3970,7183) 5(3970,7224) 5(3970,7265) 5(3970,7306) 6(4709,7144) 7(4758,7142.39) 8(4068.54,7590) 8(4448.54,7706.85) 8(4805,7142.39) 9(4708,7331) 10(4743,7373) 11(4792,7373) 12(4826,7330) 13(4029.17,7590) 13(4487.91,7706.85) 13(4832,7182) 14(4068.54,7708.11) 14(4448.54,7588.74) 15(4029.17,7708.11) 15(4487.91,7588.74) 21(4021.29,7629.37) 21(4021.29,7668.74) 21(4495.78,7628.11) 21(4495.78,7667.48)
  round 177.17 hole 108.27: 0(5157.48,5728.35) 0(5157.48,7657.48) 0(7440.94,5728.35) 0(7440.94,7657.48)

## Via types
v1: diameter 30, hole 13, Top Layer to Bottom Layer, tented both sides, 12 vias

## Nets (pads, with @x,y where several pads share a name; then routed paths per layer and width w, separated by ;. In a path a pad name is that pad's centre, name@x,y a point inside that pad or via, vN(x,y) a via of type N, cw(c..) or ccw(c..) an arc to the next point about the centre after c; other vN are vias at no path point)
0: C8.2 C9.2 C10.2 C12.2 D1.2 R23.2 U5.4 U5.9
3.3V: C13.+ J1.3 J2.3 J3.3 J4.3 J9.1 J11.1 J12.1 J13.3 J14.3 J15.3 J16.3 J17.3 U2.VCC U3.16 U4.28 U6.4
5V: C11.1 C12.1 J5.2 J6.2 J7.2 J8.2 J8.4 J10.2 L1.2 R22.1 U6.3
A_ENC0: J5.8 U2.A1
A_ENC1: J6.8 U2.13
A_ENC2: J7.8 U2.11
A_ENC3: J10.8 U2.2
A_OUT: Q1_MC1.S Q1_MC2.S Q1_MC3.S Q1_MC4.S Q3_MC1.D Q3_MC2.D Q3_MC3.D Q3_MC4.D U1_MC1.7 U1_MC2.7 U1_MC3.7 U1_MC4.7
A_OUT0: J5.5 J5.7
A_OUT1: J6.5 J6.7
A_OUT2: J7.5 J7.7
A_OUT3: J10.5 J10.7
AIOUT: U1_MC1.15 U1_MC2.15 U1_MC3.15 U1_MC4.15
AIOUT0: U2.A7
AIOUT1: U2.A6
AIOUT2: U2.A3
AIOUT3: U2.A2
B_ENC0: J5.6 U2.A0
B_ENC1: J6.6 U2.12
B_ENC2: J7.6 U2.10
B_ENC3: J10.6 U2.4
B_OUT: Q2_MC1.S Q2_MC2.S Q2_MC3.S Q2_MC4.S Q4_MC1.D Q4_MC2.D Q4_MC3.D Q4_MC4.D U1_MC1.9 U1_MC2.9 U1_MC3.9 U1_MC4.9
B_OUT0: J5.1 J5.3
B_OUT1: J6.1 J6.3
B_OUT2: J7.1 J7.3
B_OUT3: J10.1 J10.3
EN2: U2.6
EN3: U2.9
ENABLE: U1_MC1.18 U1_MC2.18 U1_MC3.18 U1_MC4.18
ENABLE0: LED5.A U2.3
ENABLE1: LED6.A U2.5
ENABLE2: LED7.A
ENABLE3: LED8.A
GND: C1_MC1.- C1_MC2.- C1_MC3.- C1_MC4.- C2_MC1.2 C2_MC2.2 C2_MC3.2 C2_MC4.2 C4_MC1.2 C4_MC2.2 C4_MC3.2 C4_MC4.2 C13.- J1.1 J2.1 J3.1 J4.1 J5.4 J6.4 J7.4 J8.6 J8.9 J8.14 J8.20 J8.25 J8.30 J8.34 J8.39 J9.3 J10.4 J11.3 J12.3 J13.1 J14.1 J15.1 J16.1 J17.1 J18.1 J19.1 J20.1 J21.1 J22.1 J23.1 pad.8@4448.54,7706.85 pad.13@4487.91,7706.85 pad.14@4448.54,7588.74 pad.15@4487.91,7588.74 pad.21@4495.78,7628.11 pad.21@4495.78,7667.48 R1_MC1.1 R1_MC2.1 R1_MC3.1 R1_MC4.1 R2_MC1.2 R2_MC2.2 R2_MC3.2 R2_MC4.2 R3_MC1.2 R3_MC2.2 R3_MC3.2 R3_MC4.2 R4_MC1.2 R4_MC2.2 R4_MC3.2 R4_MC4.2 R5_MC1.2 R5_MC2.2 R5_MC3.2 R5_MC4.2 R6_MC1.2 R6_MC2.2 R6_MC3.2 R6_MC4.2 R7_MC1.2 R7_MC2.2 R7_MC3.2 R7_MC4.2 R11.2 R12.2 R13.2 R14.2 R15.2 R16.2 R17.2 R18.2 U1_MC1.14 U1_MC1.21 U1_MC2.14 U1_MC2.21 U1_MC3.14 U1_MC3.21 U1_MC4.14 U1_MC4.21 U2.GND U3.8 U4.14 U6.1
MODE: U1_MC1.2 U1_MC2.2 U1_MC3.2 U1_MC4.2
MODE0: J3.2
MODE1: J1.2
MODE2: J2.2
MODE3: J4.2
NetC3_MC1_1: C3_MC1.1 U1_MC1.11
NetC3_MC1_2: C3_MC1.2 U1_MC1.13
NetC3_MC2_1: C3_MC2.1 U1_MC2.11
NetC3_MC2_2: C3_MC2.2 U1_MC2.13
NetC3_MC3_1: C3_MC3.1 U1_MC3.11
NetC3_MC3_2: C3_MC3.2 U1_MC3.13
NetC3_MC4_1: C3_MC4.1 U1_MC4.11
NetC3_MC4_2: C3_MC4.2 U1_MC4.13
NetC4_MC1_1: C4_MC1.1 R2_MC1.1 U1_MC1.20
NetC4_MC2_1: C4_MC2.1 R2_MC2.1 U1_MC2.20
NetC4_MC3_1: C4_MC3.1 R2_MC3.1 U1_MC3.20
NetC4_MC4_1: C4_MC4.1 R2_MC4.1 U1_MC4.20
NetC5_MC1_1: C5_MC1.1 U1_MC1.10
NetC5_MC2_1: C5_MC2.1 U1_MC2.10
NetC5_MC3_1: C5_MC3.1 U1_MC3.10
NetC5_MC4_1: C5_MC4.1 U1_MC4.10
NetC6_2: C6.2 U5.7
NetC7_1: C7.1 R20.1 U5.1
NetC11_2: C11.2 R22.2 R23.1 U5.3
NetD1_1: D1.1 L1.1 Q5.1 Q5.2 Q5.3
NetJ9_2: J9.2 R8.1
NetJ11_2: J11.2 R9.1
NetJ12_2: J12.2 R10.1
NetJ13_2: J13.2 U4.1
NetJ14_2: J14.2 U4.2
NetJ15_2: J15.2 U4.3
NetJ16_2: J16.2 U4.4
NetJ17_2: J17.2 U4.5
NETLABEL100: U2.7
NETLABEL101: U2.8
NetLED1_K: LED1.K R11.1
NetLED2_K: LED2.K R12.1
NetLED3_K: LED3.K R13.1
NetLED4_K: LED4.K R14.1
NetLED5_K: LED5.K R15.1
NetLED6_K: LED6.K R16.1
NetLED7_K: LED7.K R17.1
NetLED8_K: LED8.K R18.1
NetQ1_MC1_G: Q1_MC1.G R3_MC1.1 U1_MC1.6
NetQ1_MC2_G: Q1_MC2.G R3_MC2.1 U1_MC2.6
NetQ1_MC3_G: Q1_MC3.G R3_MC3.1 U1_MC3.6
NetQ1_MC4_G: Q1_MC4.G R3_MC4.1 U1_MC4.6
NetQ2_MC1_G: Q2_MC1.G R4_MC1.1 U1_MC1.8
NetQ2_MC2_G: Q2_MC2.G R4_MC2.1 U1_MC2.8
NetQ2_MC3_G: Q2_MC3.G R4_MC3.1 U1_MC3.8
NetQ2_MC4_G: Q2_MC4.G R4_MC4.1 U1_MC4.8
NetQ3_MC1_G: Q3_MC1.G R5_MC1.1 U1_MC1.4
NetQ3_MC1_S: Q3_MC1.S Q4_MC1.G Q4_MC1.S R6_MC1.1 R7_MC1.1 U1_MC1.3 U1_MC1.5
NetQ3_MC2_G: Q3_MC2.G R5_MC2.1 U1_MC2.4
NetQ3_MC2_S: Q3_MC2.S Q4_MC2.G Q4_MC2.S R6_MC2.1 R7_MC2.1 U1_MC2.3 U1_MC2.5
NetQ3_MC3_G: Q3_MC3.G R5_MC3.1 U1_MC3.4
NetQ3_MC3_S: Q3_MC3.S Q4_MC3.G Q4_MC3.S R6_MC3.1 R7_MC3.1 U1_MC3.3 U1_MC3.5
NetQ3_MC4_G: Q3_MC4.G R5_MC4.1 U1_MC4.4
NetQ3_MC4_S: Q3_MC4.S Q4_MC4.G Q4_MC4.S R6_MC4.1 R7_MC4.1 U1_MC4.3 U1_MC4.5
NetQ5_4: Q5.4 U5.6
NetQ5_5: Q5.5 Q5.6 Q5.7 Q5.8 Q5.9 R19.2 U5.5
NetR1_MC1_2: R1_MC1.2 U1_MC1.1
NetR1_MC2_2: R1_MC2.2 U1_MC2.1
NetR1_MC3_2: R1_MC3.2 U1_MC3.1
NetR1_MC4_2: R1_MC4.2 U1_MC4.1
NetR8_2: R8.2 U3.1
NetR9_2: R9.2 U3.2
NetR10_2: R10.2 U3.3
NetR21_2: R21.2 U5.2
NetU1_MC1_16: U1_MC1.16 U1_MC2.16 U1_MC3.16 U1_MC4.16
NetU1_MC1_17: U1_MC1.17 U1_MC2.17 U1_MC3.17 U1_MC4.17
PHASE: U1_MC1.19 U1_MC2.19 U1_MC3.19 U1_MC4.19
PHASE0: LED1.A U3.4
PHASE1: LED2.A U3.5
PHASE2: LED3.A U3.6
PHASE3: LED4.A U3.7
RXD: J8.10 U2.TXD
SCL: U2.A5 U3.14 U4.26
SCL1: J8.5
SDA: U2.A4 U3.15 U4.27
SDA1: J8.3
TXD: J8.8 U2.RXD
VBAT: C1_MC1.+ C1_MC2.+ C1_MC3.+ C1_MC4.+ C2_MC1.1 C2_MC2.1 C2_MC3.1 C2_MC4.1 C5_MC1.2 C5_MC2.2 C5_MC3.2 C5_MC4.2 C6.1 C7.2 C8.1 C9.1 C10.1 J18.2 J19.2 J20.2 J21.2 J22.2 J23.2 Q1_MC1.D Q1_MC2.D Q1_MC3.D Q1_MC4.D Q2_MC1.D Q2_MC2.D Q2_MC3.D Q2_MC4.D R19.1 R20.2 R21.1 U1_MC1.12 U1_MC2.12 U1_MC3.12 U1_MC4.12 U5.8
pads on no net: C6.0 C7.0 C8.0 C9.0 C10.0 C11.0 C12.0 J1.SM J2.SM J3.SM J4.SM J5.0 J6.0 J7.0 J8.1 J8.7 J8.11 J8.12 J8.13 J8.15 J8.16 J8.17 J8.18 J8.19 J8.21 J8.22 J8.23 J8.24 J8.26 J8.27 J8.28 J8.29 J8.31 J8.32 J8.33 J8.35 J8.36 J8.37 J8.38 J8.40 J9.SM J10.0 J11.SM J12.SM J13.SM J14.SM J15.SM J16.SM J17.SM LED1.0 LED2.0 LED3.0 LED4.0 LED5.0 LED6.0 LED7.0 LED8.0 R3_MC1.0 R3_MC2.0 R3_MC3.0 R3_MC4.0 R4_MC1.0 R4_MC2.0 R4_MC3.0 R4_MC4.0 R5_MC1.0 R5_MC2.0 R5_MC3.0 R5_MC4.0 R6_MC1.0 R6_MC2.0 R6_MC3.0 R6_MC4.0 R8.0 R9.0 R10.0 R11.0 R12.0 R13.0 R14.0 R15.0 R16.0 R17.0 R18.0 R20.0 R21.0 R22.0 R23.0 U2.RAW U2.RST1 U2.RST2 U3.0 U3.9 U3.10 U3.11 U3.12 U3.13 U4.6 U4.7 U4.8 U4.9 U4.10 U4.11 U4.12 U4.13 U4.15 U4.16 U4.17 U4.18 U4.19 U4.20 U4.21 U4.22 U4.23 U4.24 U4.25 U6.0
copper on no net: | length 6537.5
  Top Layer w10: 3539.74,7650.99 3539.37,7650.62 3539.37,7625.98 3544.87,7620.49 3639.35,7620.49 3645.67,7614.17 3645.67,7588.98 3705.02,7588.98 v1(3714,7580) ; 3617.74,7199.41 3702.93,7199.41 3709.33,7193 v1(3712,7193) ; v1(3716,7235) 3716,7308 3720.41,7312.41 3748.4,7312.41 ; 3826.4,7537.99 3829,7535.39 3826.5,7532.89 v1(3826.5,7483.15) ; v1(4013,7391) 4019.32,7397.31 4239.26,7397.31 ; v1(4016,7490) 4114,7490 4147.63,7456.37 4239.26,7456.37 ; v1(4061,7425) 4069,7417 4239.26,7417 ; v1(4100.63,7459) 4122.94,7436.69 4239.26,7436.69 ; 4122.94,7233.91 4122.94,7330.57 4170,7377.63 4239.26,7377.63 ; 4133.54,7648.43 4255.57,7648.43 4318,7586 4318,7495.74 ; v1(4162,7497) 4163.26,7495.74 4278.63,7495.74 ; 4177.94,7233.91 4214.1,7197.75 4298,7197.75 ; v1(4188,7536.22) 4210.78,7559 4290,7559 4298.31,7550.69 4298.31,7495.74 ; 4270,7233.91 4270,7266.37 4278.63,7275 4278.63,7338.26 ; 4298.31,7338.26 4298.31,7198.06 4298,7197.75 ; 4318,7338.26 4318,7270 4325,7263 4325,7233.91 ; 4337.69,7338.26 4337.69,7291.31 4358,7271 4471,7271 4481,7281 ; 4357.37,7495.74 4535.74,7495.74 4625,7585 ; 4396.74,7456.37 4567.37,7456.37 4665,7554 4665,7635 4655,7645 4625,7645 4625,7705 ; 4487.91,7706.85 4489.76,7705 4570,7705 ; 4491.65,7585 4570,7585 ; 4495.78,7628.11 4512.67,7645 4570,7645 ; 4696.85,7200.79 4696.64,7201 4481,7201 4477.75,7197.75 4298,7197.75
  Bottom Layer w10: v1(3712,7193) 3807,7193 3963,7349 4043,7349 4162,7468 v1(4162,7497) ; v1(3714,7580) 3738,7556 4168.22,7556 v1(4188,7536.22) v1@4183.78,7532 ; v1(3716,7235) 3821,7235 3951,7365 4023.77,7365 4061,7402.23 v1(4061,7425) ; v1@3819.29,7447 v1(3824,7447) 3851,7420 4019.23,7420 4050.23,7451 4082.2,7451 4090.2,7459 v1(4100.63,7459) ; v1(3823,7408) 3840,7391 v1(4013,7391) ; v1(3826.5,7483.15) 3869.65,7440 4004,7440 4016,7452 v1(4016,7490)

## Polygon pours and split planes (outlines as drawn)
no net on Bottom Layer "C1+" (solid, pour order 21): 3824,7122 3824,7165 3821,7168 3942,7289 3942,7326 3995,7326 4000,7331 4007,7338 4699,7338 4738,7398 4798,7398 4840.43,7295.57 4844,7292 4850,7286 4850,7153 4819,7122 4738,7122
no net on Bottom Layer "BOTQ3S" (solid, pour order 20): 3488.19,7666 3492.19,7670 3664,7670 3664,7391 3664,7231 3732,7163 3732,7118 3664,7118 3491.72,7118 3491.72,7120.28 3488,7124 3488.19,7151
GND on Bottom Layer "GND " (solid, shelved, pour order 13): 1771.65,2362.2 3740.16,2362.2 3740.16,4330.71 1771.65,4330.71
no net on Bottom Layer "GND" (solid, pour order 16): 3488.19,7732.28 4095,7732.28 4095,7578.51 4077,7569 3999,7569 3488.19,7569 3488.19,7645.67
no net on Top Layer "Q1STOP" (solid, pour order 23): 3534,7606.39 3719.56,7606.39 3746.56,7579.39 3766.56,7559.39 3834,7559.39 3834,7457.39 3834,7438.81 3835.76,7433.39 3810,7433.39 3518,7433.39 3518,7589.39 3535,7606.39
no net on Top Layer "Q2STOP" (solid, pour order 24): 3534,7244 3719.56,7244 3746.56,7271 3766.56,7291 3837,7291 3837,7390 3837,7431 3796,7431 3518,7431 3518,7261 3535,7244
no net on Top Layer "C1+" (solid, pour order 22): 4685,7338.26 4685,7121 4686,7120 4687,7121 4827,7121 4827,7132 4848,7153 4849,7154 4849,7285 4849,7339.31 4791,7397.31 4788.31,7400 4734,7400
no net on Top Layer "TOPQ3S" (solid, pour order 19): 3738,7732 3738,7571.1 3838,7565 3841.92,7427.8 3838,7271 3746.56,7271 3741.66,7168.18 3787.61,7120 3991,7120 3991,7732
no net on Top Layer "TOPQ3S" (solid, pour order 17): 3531,7219.39 3626,7219.39 3631,7219.39 3631,7164.39 3729,7164.39 3729,7118.39 3492,7118.39 3487,7123.39 3488,7124.39 3488,7176.39
no net on Top Layer "TOPQ3S" (solid, pour order 18): 3557,7631 3626,7631 3674,7631 3729,7686 3729,7732 3492,7732 3487,7727 3488,7726 3488,7688 3494,7682 3557,7682
no net on Top Layer "GND" (solid, pour order 14): 4158.54,7588.43 4158.54,7708.43 4098.54,7708.43 4078.54,7728.43 3998.54,7728.43 3998.54,7568.43 4078.54,7568.43 4098.54,7588.43
GND on Top Layer "GND" (solid, pour order 15): 4358.54,7708.43 4358.54,7588.43 4418.54,7588.43 4438.54,7568.43 4518.54,7568.43 4518.54,7728.43 4438.54,7728.43 4418.54,7708.43

## Silkscreen, mask and mechanical layers (free items; w line width, h text height)
Mechanical 1:
  lines w10: 1771.65,2362.2 1771.65,4330.71 3740.16,4330.71 3740.16,2362.2 1771.65,2362.2
Mechanical 2:
  circle w0.5: c7440.95,5728.35 r54.13
  circle w0.5: c5157.48,5728.35 r54.13
  circle w0.5: c5157.48,7657.48 r54.13
  circle w0.5: c7440.95,7657.48 r54.13
  lines w0.5: 4957.81,7134.42 5115.29,7134.42 ; 4961.74,7130.48 5111.35,7130.48 ; 5064.1,7106.86 5064.1,6278.97 5221.59,6278.97 5221.59,6696.64 5217.65,6696.64 5217.65,6282.91 5068.04,6282.91 5068.04,7102.92 ; 5217.65,7102.92 5217.65,6732.28 5221.59,6732.28 5221.59,7106.86 ; 5019.68,5708.66 ccw(c5137.79,5708.66) 5137.79,5590.55 5289.37,5590.55 5289.37,5779.53 5414.76,5779.53 5414.76,5775.59 5293.31,5775.59 5293.31,5590.55 5580.71,5590.55 5580.71,5775.59 5449.85,5775.59 5449.85,5779.53 5584.65,5779.53 5584.65,5590.55 5994.09,5590.55 5994.09,6003.94 6259.22,6003.94 6259.22,6000 5998.03,6000 5998.03,5590.55 6561.02,5590.55 6561.02,6000 6311.62,6000 6311.62,6003.94 6564.96,6003.94 6564.96,5590.55 6988.19,5590.55 6988.19,6082.68 7078.71,6082.68 7078.71,6078.74 6992.13,6078.74 6992.13,5590.55 7259.84,5590.55 7259.84,6078.74 7167.82,6078.74 7167.82,6082.68 7263.78,6082.68 7263.78,5590.55 8248.03,5590.55 ccw(c8248.03,5708.66) 8364.49,5688.98 7606.3,5688.98 7606.3,5994.09 7610.24,5994.09 7610.24,5692.91 8365.09,5692.91 ccw(c8248.03,5708.66) 8366.14,5708.66 8366.14,6295.28 7610.24,6295.28 7610.24,6043.31 7606.3,6043.31 7606.3,6299.21 8366.14,6299.21 8366.14,6476.38 7748.03,6476.38 7748.03,6708.95 7751.97,6708.95 7751.97,6480.31 8366.14,6480.31 8366.14,6984.25 7751.97,6984.25 7751.97,6793.42 7748.03,6793.42 7748.03,6988.19 8366.14,6988.19 8366.14,7185.04 7748.03,7185.04 7748.03,7425.64 7751.97,7425.64 7751.97,7188.98 8366.14,7188.98 8366.14,7677.17 ccw(c8248.03,7677.17) 8365.09,7692.91 7751.97,7692.91 7751.97,7491.23 7748.03,7491.23 7748.03,7696.85 8364.49,7696.85 ccw(c8248.03,7677.17) 8248.03,7795.28 5137.79,7795.28 ccw(c5137.79,7677.17) 5019.68,7677.17 5019.68,5708.66 ; 5297.24,7559.06 5297.24,7755.91 7301.18,7755.91 7301.18,7559.06 6342.26,7559.06 6342.26,7562.99 7297.24,7562.99 7297.24,7751.97 5301.18,7751.97 5301.18,7562.99 6241.8,7562.99 6241.8,7559.06 5297.24,7559.06 ; 6712.6,5602.36 6712.6,6018.7 6716.54,6018.7 6716.54,5606.3 6866.14,5606.3 6866.14,6480.31 6716.54,6480.31 6716.54,6095.51 6712.6,6095.51 6712.6,6484.25 6870.08,6484.25 6870.08,5602.36 6712.6,5602.36
Mechanical 5:
  circle w10: c5157.48,7657.48 r54.13
  circle w10: c5157.48,5728.35 r54.13
  circle w10: c7440.94,5728.35 r54.13
  circle w10: c7440.94,7657.48 r54.13
  lines w10: 3013.78,3654.53 7578.74,3654.53 7578.74,7795.28 3013.78,7795.28 3013.78,3654.53

## Text inside footprints (layer, text, board x,y; h text height)
C1_MC1: Top Overlay "+" at 13842.22,9059.49 h35
C1_MC2: Top Overlay "+" at 14162.12,9606.76 h35
C1_MC3: Top Overlay "+" at 14162.12,10154.03 h35
C1_MC4: Top Overlay "+" at 14162.12,10700.32 h35
C13: Top Overlay "+" at 5040.35,5069.88 h35
D1: Top Overlay "RefDes" at 6945.87,4442.91 h50 r180; Top Overlay "DEV" at 6945.87,4442.91 h50 r180; Top Overlay "PN" at 6945.87,4442.91 h50 r180; Top Overlay "DEV" at 6945.87,4442.91 h50 r180; Top Overlay "VAL" at 6945.87,4442.91 h50 r180; Top Overlay "TOL" at 6945.87,4442.91 h50 r180
J1: Top Overlay "3" at 19328.81,7623.6 h35; Top Overlay "2" at 19248.81,7623.6 h35; Top Overlay "1" at 19168.81,7623.6 h35
J2: Top Overlay "3" at 18287.42,7623.6 h35; Top Overlay "2" at 18207.42,7623.6 h35; Top Overlay "1" at 18127.42,7623.6 h35
J3: Top Overlay "3" at 17717.51,7623.6 h35; Top Overlay "2" at 17637.51,7623.6 h35; Top Overlay "1" at 17557.51,7623.6 h35
J4: Top Overlay "3" at 18001.98,7623.6 h35; Top Overlay "2" at 17921.98,7623.6 h35; Top Overlay "1" at 17841.98,7623.6 h35
J8: Top Overlay "39" at 7223.43,7488.19 h30; Top Overlay "40" at 7223.43,7799.21 h30; Top Overlay "1" at 5341.54,7488.19 h30; Top Overlay "2" at 5333.66,7795.28 h30; Bottom Overlay "39" at 7267.29,7487.48 h30; Bottom Overlay "1" at 5349.29,7487.48 h30; Bottom Overlay "2" at 5354.29,7797.48 h30; Bottom Overlay "40" at 7267.29,7797.48 h30
J9: Top Overlay "3" at 15684.94,7623.6 h35; Top Overlay "2" at 15604.94,7623.6 h35; Top Overlay "1" at 15524.94,7623.6 h35
J11: Top Overlay "3" at 14426.02,7623.6 h35; Top Overlay "2" at 14346.02,7623.6 h35; Top Overlay "1" at 14266.02,7623.6 h35
J12: Top Overlay "3" at 13968.32,7623.6 h35; Top Overlay "2" at 13888.32,7623.6 h35; Top Overlay "1" at 13808.32,7623.6 h35
J13: Top Overlay "3" at 12993.86,7623.6 h35; Top Overlay "2" at 12913.86,7623.6 h35; Top Overlay "1" at 12833.86,7623.6 h35
J14: Top Overlay "3" at 12708.41,7623.6 h35; Top Overlay "2" at 12628.41,7623.6 h35; Top Overlay "1" at 12548.41,7623.6 h35
J15: Top Overlay "3" at 11446.54,7623.6 h35; Top Overlay "2" at 11366.54,7623.6 h35; Top Overlay "1" at 11286.54,7623.6 h35
J16: Top Overlay "3" at 11161.09,7623.6 h35; Top Overlay "2" at 11081.09,7623.6 h35; Top Overlay "1" at 11001.09,7623.6 h35
J17: Top Overlay "3" at 10366.76,7623.6 h35; Top Overlay "2" at 10286.76,7623.6 h35; Top Overlay "1" at 10206.76,7623.6 h35
L1: Top Overlay "RefDes" at 6925.2,4874.02 h50 r270; Top Overlay "DEV" at 6925.2,4874.02 h50 r270; Top Overlay "PN" at 6925.2,4874.02 h50 r270; Top Overlay "DEV" at 6925.2,4874.02 h50 r270; Top Overlay "VAL" at 6925.2,4874.02 h50 r270; Top Overlay "TOL" at 6925.2,4874.02 h50 r270
U5: Top Overlay "*" at 6482.33,4667.61 h50 r180